# Altium PCB NodeController.PcbDoc
Units mm, origin at the board's own origin, x right, y up, seen from the top; angles counter-clockwise.
Board outline 76.2 x 50.8 mm, 4 copper layers (Top Layer, Power, Ground, Bottom Layer), stack 1.586 mm thick; 34 components, 28 nets, 142 pads, 41 vias.
Unrouted connection lines stored in the file: 42.
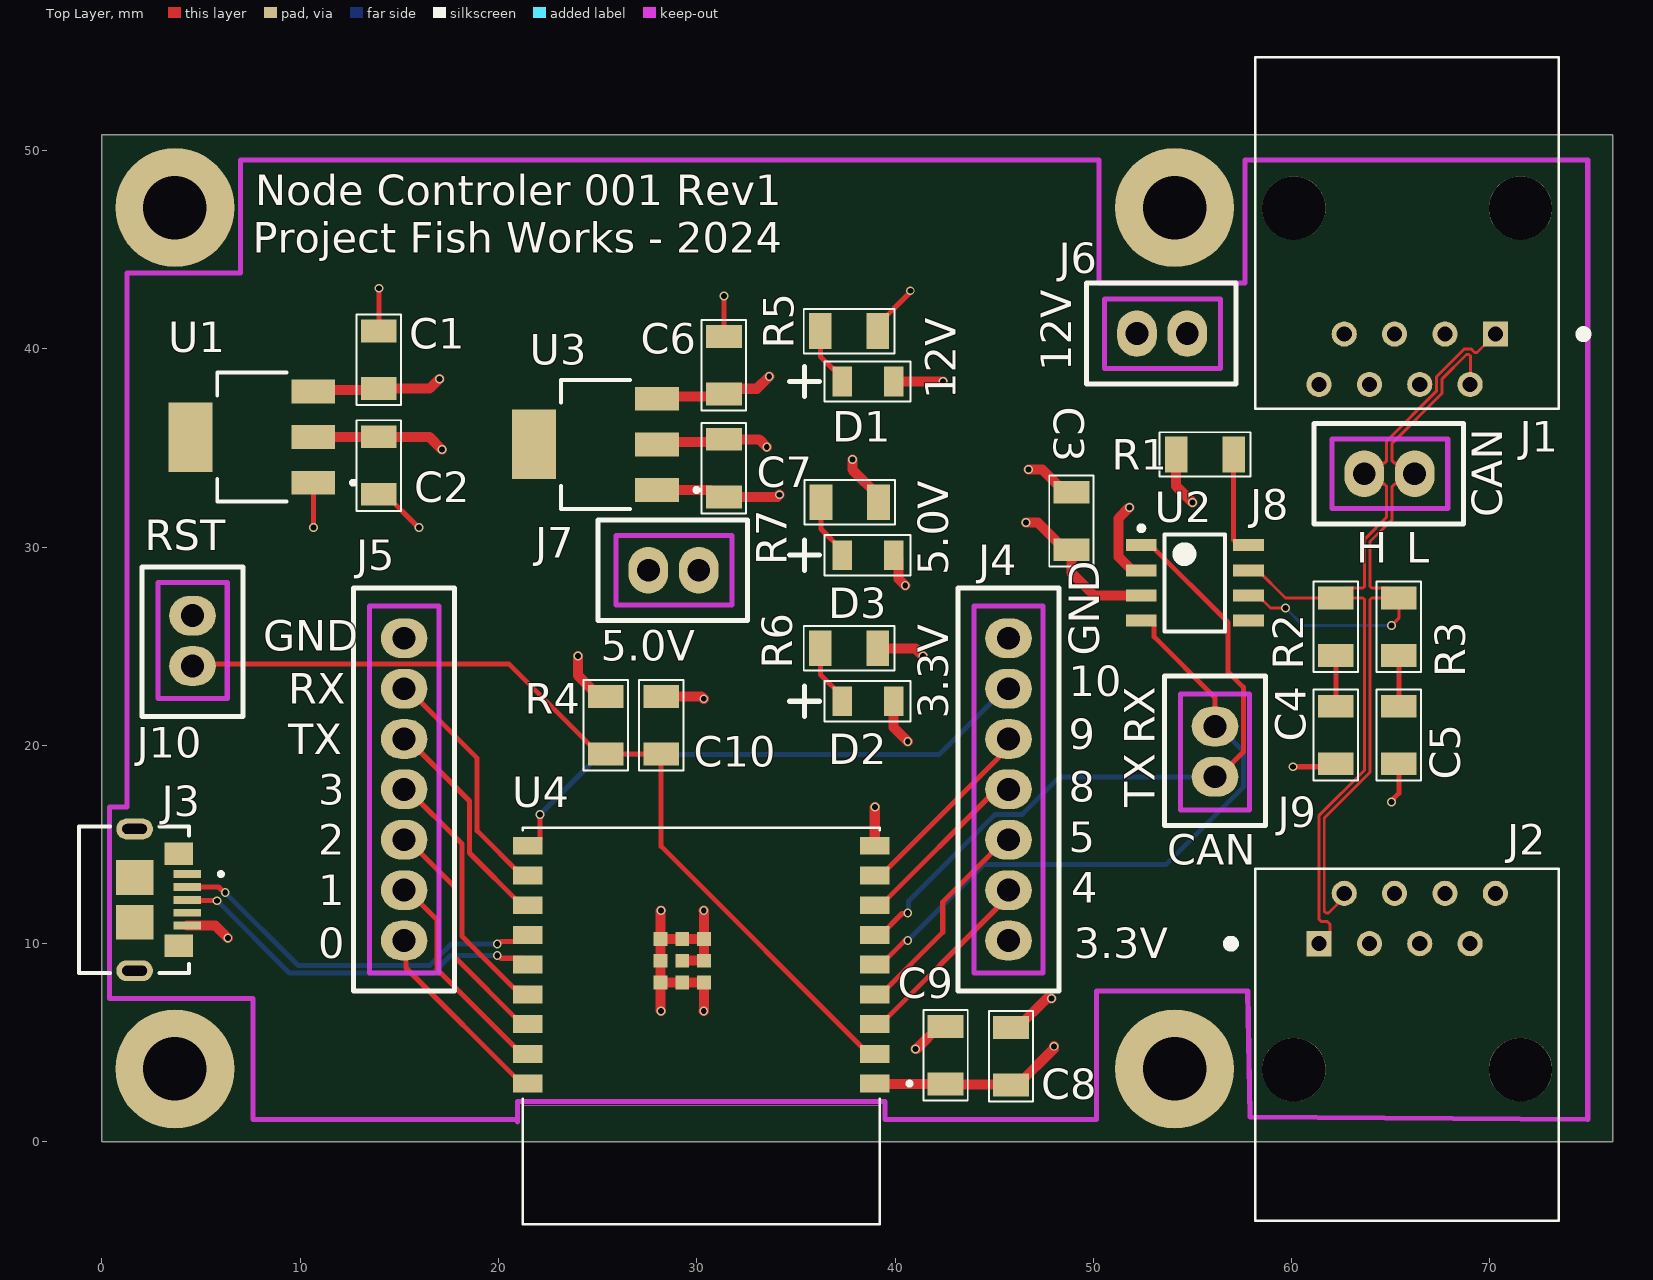
[diagram p0: Top Layer view]
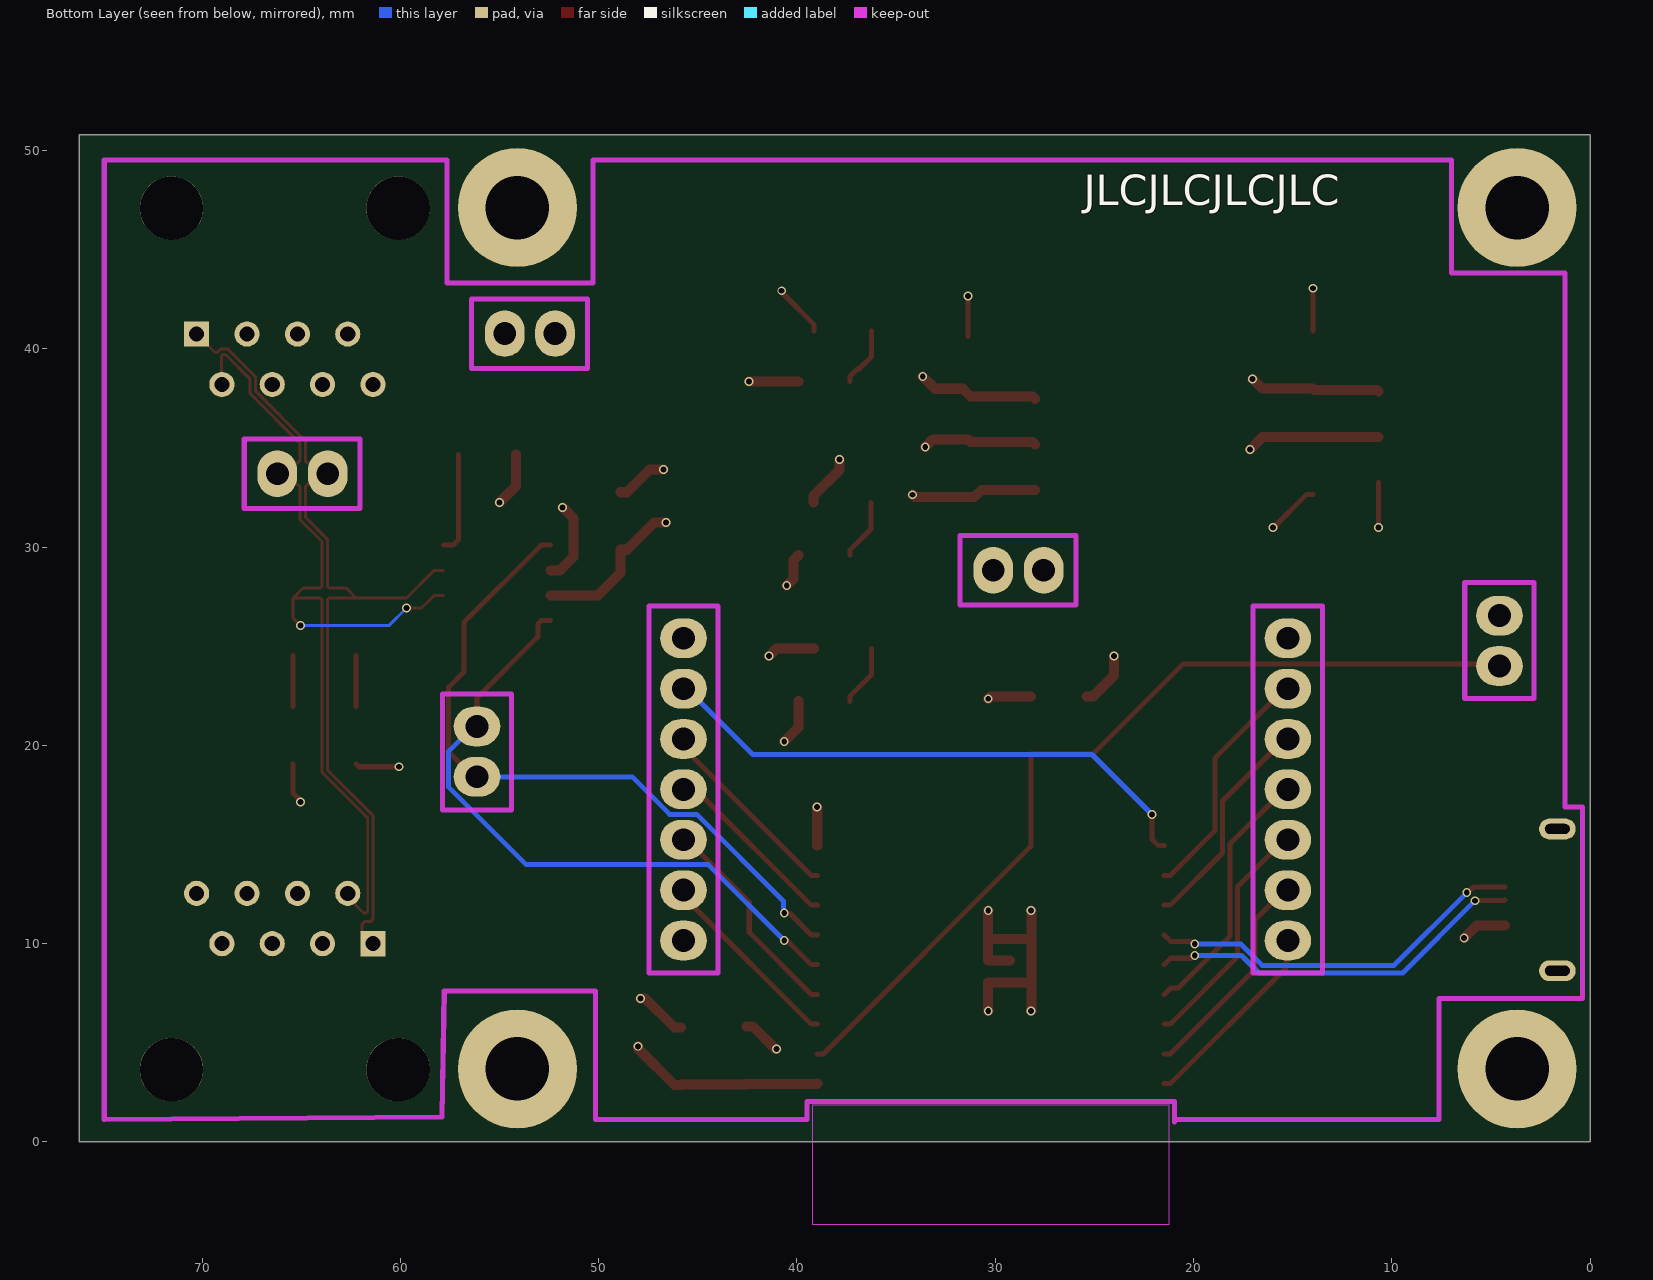
[diagram p1: Bottom Layer view, seen from below]
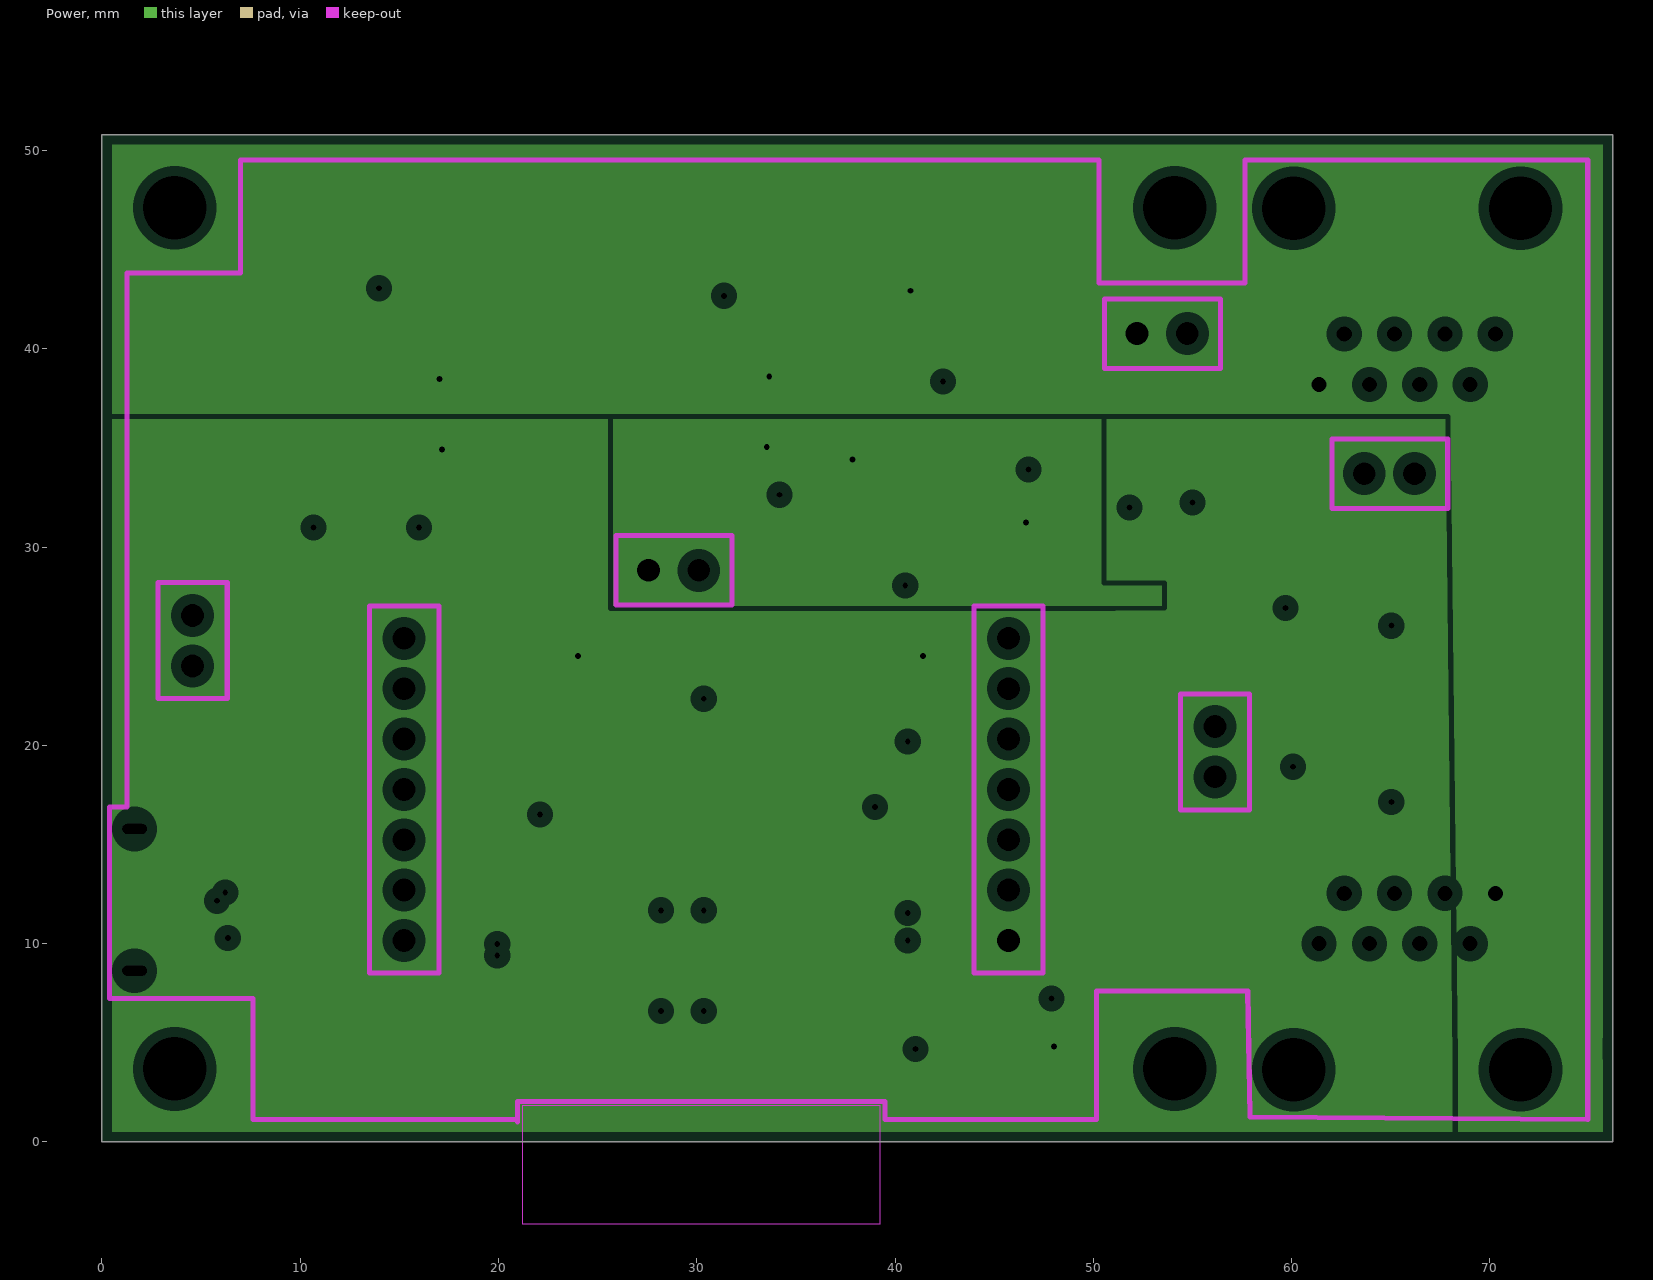
[diagram p2: Power, clearances drawn from the general rule]
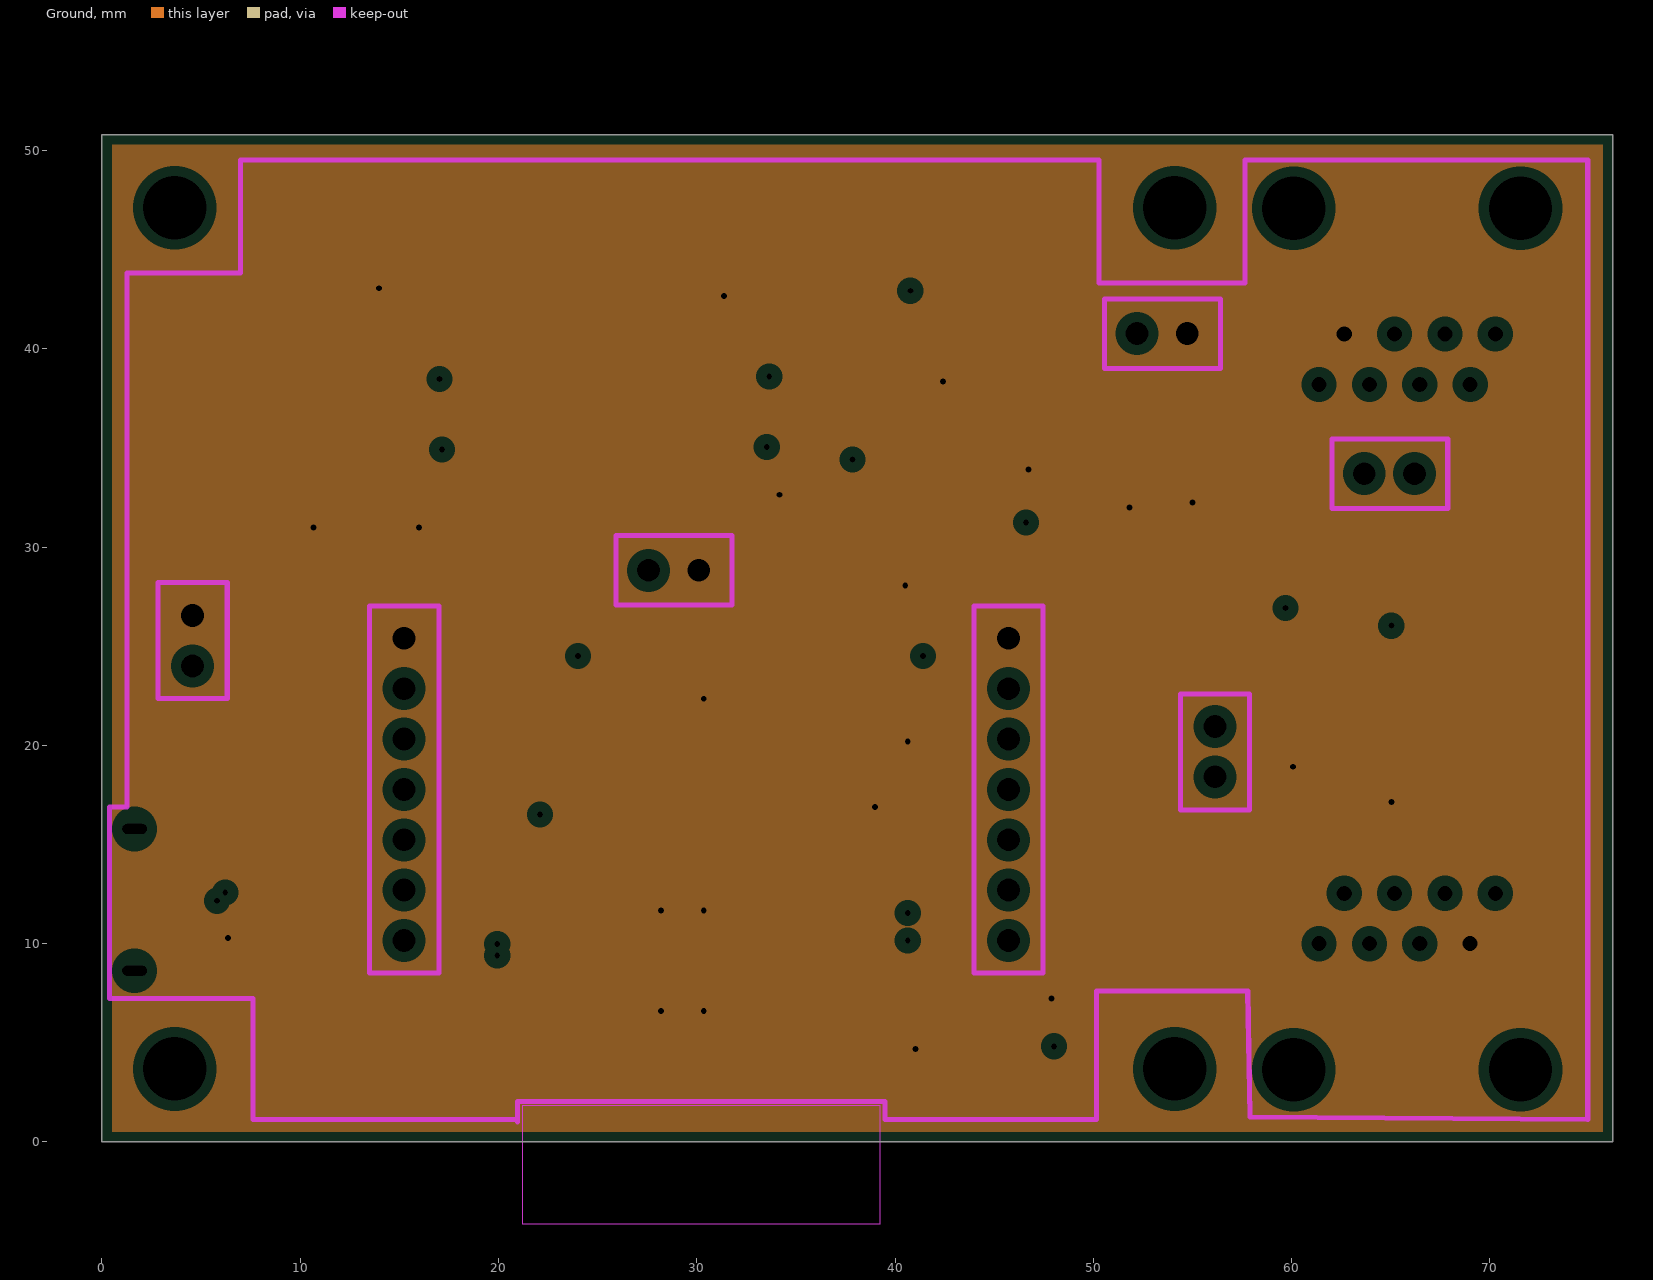
[diagram p3: Ground, clearances drawn from the general rule]

## Layer stack, top to bottom
Top Solder: solder mask 0.0102, Solder Resist, Dk 3.8
Top Layer: signal copper 0.035
Dielectric 2: prepreg 0.2104, PP-7628, Dk 4.4
Power: plane copper 0.0152, net (Multiple Nets)
Dielectric 1: core 1.065, FR-4, Dk 4.6
Ground: plane copper 0.0152, net GND
Dielectric 3: prepreg 0.2104, PP-7628, Dk 4.4
Bottom Layer: signal copper 0.035
Bottom Solder: solder mask 0.0102, Solder Resist, Dk 3.8

## Board outline
0,0 76.2,0 76.2,50.8 0,50.8

## Design rules (kind name [scope] priority, off if disabled: settings)
Clearance [All] p1: gap=0.127 ignorepadtopadclearanceinfootprint=TRUE
DiffPairsRouting DiffPairsRouting_1 [InDifferentialPairClass('USB')] p1: maxlimit=1 minlimit=0.09 mostfreqgap=0.127 toplayer_minwidth=0.09 toplayer_maxwidth=1 toplayer_prefwidth=0.148 bottomlayer_minwidth=0.09 bottomlayer_maxwidth=1 bottomlayer_prefwidth=0.148 impedanceprofiledriven=TRUE impedanceprofileid={B7D09003-3519-449B-9E33-71E7C88A8C5F} impedanceprofilevalue=100.000000 maxuncoupledlength=12.7
DiffPairsRouting [InDifferentialPairClass('CAN ')] p2: maxlimit=0.127 minlimit=0.127 mostfreqgap=0.127 toplayer_minwidth=0.148 toplayer_maxwidth=0.148 toplayer_prefwidth=0.148 bottomlayer_minwidth=0.148 bottomlayer_maxwidth=0.148 bottomlayer_prefwidth=0.148 impedanceprofiledriven=TRUE impedanceprofileid={B7D09003-3519-449B-9E33-71E7C88A8C5F} impedanceprofilevalue=100.000000 maxuncoupledlength=12.7
HoleSize [All] p1: absolutevalues=TRUE maxlimit=6.3 minlimit=0.025 maxpercent=80.000 minpercent=20.000
MinimumSolderMaskSliver [All] p1: minsoldermaskwidth=0.08
PlaneClearance [All] p1: clearance=0.508
PlaneConnect [All] p1: planeconnectstyle=Relief reliefexpansion=0.508 reliefentries=4 reliefconductorwidth=0.254 reliefairgap=0.254
PolygonConnect [All] p1: connectstyle=Relief reliefconductorwidth=0.254 reliefentries=4 polygonreliefangle="90 Angle" airgapwidth=0.254
RoutingVias [All] p1: holewidth=0.3 width=0.45 viastyle="Through Hole" minholewidth=0.3 minwidth=0.25 maxholewidth=6.3 maxwidth=10
SilkToSilkClearance [All] p1: silktosilkclearance=0.15
SilkToSolderMaskClearance [IsPad] p1: minsilkscreentomaskgap=0.15 clearancetoexposedcopper=TRUE
SolderMaskExpansion [All] p1: expansion=0.102 istentingtop=FALSE
Width Width_POWER [InNetClass('Power')] p1: maxlimit=0.508 minlimit=0.254 preferedwidth=0.508 minimp=50.000000 maximp=50.000000 favimp=50.000000
Width [InNetClass('All Nets')] p2: maxlimit=0.508 minlimit=0.254 preferedwidth=0.254 minimp=50.000000 maximp=50.000000 favimp=50.000000
23 further rules are at their usual default settings.

## Classes and differential pairs
differential pair CAN: +CAN_P -CAN_N
differential pair "USB D": +"USB D_P" -"USB D_N"

## Components (designator, comment, footprint, x,y, rotation, side; value= is the part's Value field where it differs from the comment)
C1 "10uF" Resistor/Cap-1206 13.97,39.444 r270 top value=100pF
C2 "22uF" Resistor/Cap-1206 13.97,34.11 r90 top value=100pF
C3 "0.1uF" Resistor/Cap-1206 48.895,31.316 r270 top value=100pF
C4 "560pF" Resistor/Cap-1206 62.23,20.521 r270 top value=100pF
C5 "560pF" Resistor/Cap-1206 65.405,20.521 r270 top value=100pF
C6 "10uF" Resistor/Cap-1206 31.369,39.169 r270 top value=100pF
C7 "22uF" Resistor/Cap-1206 31.369,33.983 r90 top value=100pF
C8 "10uF" Resistor/Cap-1206 45.847,4.318 r90 top value=100pF
C9 "0.1uF" Resistor/Cap-1206 42.545,4.371 r90 top value=100pF
C10 "10uF" Resistor/Cap-1206 28.204,21.008 r90 top value=100pF
D1 "LED" LED-1206 40.005,38.354 r180 top
D2 "LED" LED-1206 40.005,22.225 r180 top
D3 "LED" LED-1206 40.005,29.591 r180 top
J1 "54602-908LF" AMPHENOL_54602-908LF 65.825,47.09 r180 top
J2 "54602-908LF" AMPHENOL_54602-908LF 65.825,3.65 r0 top
J3 "USB3076-XX-X_REVC5" GCT_USB3076-XX-X_REVC5 1.651,12.211 r270 top
J4 "CON7X1" CON7X1 45.72,10.16 r90 top
J5 "CON7X1" CON7X1 15.24,10.16 r90 top
J6 "CON2X1" CON2X1 52.197,40.767 r0 top
J7 "CON2X1" CON2X1 27.559,28.829 r0 top
J8 "CON2X1" CON2X1 63.66,33.7 r0 top
J9 "CON2X1" CON2X1 56.134,20.955 r270 top
J10 "CON2X1" CON2X1 4.572,24.003 r90 top
R1 "4.7K" Resistor/Cap-1206 55.626,34.671 r0 top
R2 "100" Resistor/Cap-1206 62.23,25.982 r270 top
R3 "100" Resistor/Cap-1206 65.405,25.982 r270 top
R4 "10K" Resistor/Cap-1206 25.404,21.008 r270 top
R5 "1k" Resistor/Cap-1206 37.681,40.894 r180 top
R6 "1k" Resistor/Cap-1206 37.681,24.892 r180 top
R7 "1k" Resistor/Cap-1206 37.719,32.258 r180 top
U1 "AZ1117IH-3.3TRG1" SOT230P700X185-4N 7.568,35.546 r180 top
U2 "MCP2551-I/SN" MCP2551 55.118,28.194 r0 top
U3 "AZ1117IH-5TRG1" SOT230P700X185-4N 24.892,35.179 r180 top
U4 "ESP32-C3-WROOM-02" MODULE_ESP32-C3-WROOM-02-H4 30.226,5.842 r180 top

## Footprints (in the part's own frame and the unit in brackets; to place one, negate y for a bottom-side part, rotate by r counter-clockwise, add the part's x,y. Pads: shape width x height; smd on the part's side, far side on the other; paste and mask are expansions set on the pad)
AMPHENOL_54602-908LF [mm]
  rect 1.268x1.268 / inner round 1.268 / far side rect 1.268x1.268 hole 0.76: 1(-4.445,6.35)
  round 1.268 hole 0.76: 2(-3.175,8.89) 3(-1.905,6.35) 4(-0.635,8.89) 5(0.635,6.35) 6(1.905,8.89) 7(3.175,6.35) 8(4.445,8.89)
  round 3.2 hole 3.2 unplated: ""(-5.715,0) ""(5.715,0)
  silkscreen extent -9.09,-7.62 7.65,10.12, body extent -7.65,-7.62 7.65,10.12, height 12.7
CON2X1 [mm] "2.54mm based header"
  oval 2x2.35 hole 1.15: 0(0,0) 1(2.54,0)
  Keep-Out Layer lines w0.254: -1.63,-1.75 4.21,-1.75 4.21,1.75 -1.63,1.75 -1.63,-1.75
  silkscreen extent -2.54,-2.54 5,2.54
CON7X1 [mm] "2.54mm based header"
  oval 2x2.35 hole 1.15: 0(0,0) 1(2.54,0) 2(5.08,0) 3(7.62,0) 4(10.16,0) 5(12.7,0) 6(15.24,0)
  Keep-Out Layer lines w0.254: -1.63,1.75 -1.63,-1.75 16.87,-1.75 16.87,1.75 -1.63,1.75
  silkscreen extent -2.54,-2.54 17.78,2.54
GCT_USB3076-XX-X_REVC5 [mm]
  rect 0.4x1.4 smd mask+0.05: 1(-1.3,2.65) 2(-0.65,2.65) 3(0,2.65) 4(0.65,2.65) 5(1.3,2.65)
  oval 1.05x1.85 hole 0.5 slot 1.252 at 90 deg: 6(-3.575,0) 7(3.575,0)
  rect 1.15x1.45 smd mask+0.05: 8(-2.32,2.23) 9(2.32,2.23)
  rect 1.75x1.9 smd: 10(-1.125,0) 11(1.125,0)
  silkscreen extent -3.7,-2.8 3.7,4.45, body extent -3.7,-2.78 3.7,2.78, height 2.66
LED-1206 [mm]
  rect 1x1.5 smd: A(2.67,0) K(0.074,0)
  silkscreen extent -0.76,-1.02 5.33,1.02
MCP2551 [mm] "SOIC, 8-Leads, Body 4.9x3.9mm, Pitch 1.27mm"
  rect 1.55x0.6 smd: 1(-2.7,1.905) 2(-2.7,0.635) 3(-2.7,-0.635) 4(-2.7,-1.905) 5(2.7,-1.905) 6(2.7,-0.635) 7(2.7,0.635) 8(2.7,1.905)
  silkscreen extent -2.82,-2.45 1.53,2.88, body extent -3,-2.45 3,2.45, height 1.75
MODULE_ESP32-C3-WROOM-02-H4 [mm]
  rect 0.7x0.7 smd: 0(-0.14,-2.2) 0(-0.14,-3.3) 0(-0.14,-4.4) 0(0.96,-2.2) 0(0.96,-3.3) 0(0.96,-4.4) 0(2.06,-4.4) 0(2.06,-3.3) 0(2.06,-2.2)
  rect 1.5x0.9 smd: 1(-8.75,2.9) 2(-8.75,1.4) 3(-8.75,-0.1) 4(-8.75,-1.6) 5(-8.75,-3.1) 6(-8.75,-4.6) 7(-8.75,-6.1) 8(-8.75,-7.6) 9(-8.75,-9.1) 10(8.75,-9.1) 11(8.75,-7.6) 12(8.75,-6.1) 13(8.75,-4.6) 14(8.75,-3.1) 15(8.75,-1.6) 16(8.75,-0.1) 17(8.75,1.4) 18(8.75,2.9)
  Keep-Out Layer region: 9,4 -9,4 -9,10 9,10
  Keep-Out Layer region: 9,4 -9,4 -9,10 9,10
  silkscreen extent -10.6,-10 9,10, body extent -9,-10 9,10, height 3.35
Resistor/Cap-1206 [mm]
  rect 1.15x1.8 smd: 1(-1.45,0) 2(1.45,0)
  silkscreen extent -2.29,-1.12 2.29,1.12
SOT230P700X185-4N [mm]
  rect 2.2x1.2 smd: 1(-3.1,2.3) 2(-3.1,0) 3(-3.1,-2.3)
  rect 2.2x3.5 smd: 4(3.1,0)
  silkscreen extent -5.2,-3.25 1.75,3.25, body extent -3.5,-3.25 3.5,3.25, height 1.65

## Part data
C1 C2 C3 C4 C5 C6 C7 C8 C9 C10: library part Cap, "Capacitor", LatestRevisionDate=17-Jul-2002, LatestRevisionNote="Re-released for DXP Platform.", PackageDescription="Radial Cap, Thru-Hole; 2 Leads; 0.3 in Pin Spacing", PackageReference=RAD-0.3, Published=8-Jun-2000, Publisher="Altium Limited"
D1 D2 D3: "Light Emitting Diode LED"
J1 J2: "No Description Available", Mfr_Name="Amphenol ICC", Copyright="Copyright (C) 2024 Ultra Librarian. All rights reserved.", Manufacturer_Part_Number=54602-908LF, RefDes=RefDes, Type=DEV
J3: library part 10118193-0001LF, "Micro USB 2.0, Input Output Connectors, B TYPE RECEPTACLE", Package=None, Availability="In Stock", Check_prices=https://www.snapeda.com/parts/10118193-0001LF/Amphenol+FCI/view-part/?ref=eda, MF="Amphenol ICC", MP=10118193-0001LF, Price=None, Purchase-URL=https://pricing.snapeda.com/search/part/10118193-0001LF/?ref=eda, SnapEDA_Link=https://www.snapeda.com/parts/10118193-0001LF/Amphenol+FCI/view-part/?ref=snap
R1 R2 R3 R4 R5 R6 R7: library part RES1, "Resistor"
U1: library part AZ1117IH-3.3TRG1_1, "No Description Available", Mfr_Name="Diodes Inc", RefDes=RefDes, Type=Type
U2: "High-Speed CAN Transceiver, /  1 Mb/s, 4.5 to 5.5 V, 8-Pin SOIC (SN), Industrial Temperature, RoHS, Tube", Manufacturer=Microchip, ComponentLink1Description="Manufacturer URL", ComponentLink1URL=http://www.microchip.com/, ComponentLink2Description=Datasheet, ComponentLink2URL=http://ww1.microchip.com/downloads/en/DeviceDoc/21667f.pdf, ComponentLink3Description="Package Specification", ComponentLink3URL=http://www.microchip.com/stellent/groups/techpub_sg/documents/packagingspec/en012702.pdf, DatasheetVersion="Rev. F, 07/2010", Mounting Technology="Surface Mount", PackageDescription="8-Pin Small Outline Integrated Circuit, Body 4.9 x 3.9 mm, Pitch 1.27 mm", PackageReference=SN8, RoHSCompliant=true
U3: library part AZ1117IH-5TRG1_1_1, "No Description Available", Mfr_Name="Diodes Inc", RefDes=RefDes, Type=Type
U4: Datasheet=https://www.espressif.com/sites/default/files/documentation/esp32-c3-wroom-02_datasheet_en.pdf, ki_description="ESP32-C3-WROOM-02 is a general-purpose Wi-Fi and Bluetooth LE module. This module features a rich set of peripherals and high performance, which makes it an ideal choice for smart home, industrial automation, health care, consumer electronics, etc.", ki_keywords="esp32-c3 module", Reference=U

## Free pads (board coordinates)
  round 6 hole 3.2: 3(3.683,3.683) 3(3.683,47.117) 3(54.102,3.683) 3(54.102,47.117)

## Via types
v1: diameter 0.45, hole 0.3, Top Layer to Bottom Layer, 41 vias

## Nets (pads, with @x,y where several pads share a name; then routed paths per layer and width w, separated by ;. In a path a pad name is that pad's centre, name@x,y a point inside that pad or via, vN(x,y) a via of type N, cw(c..) or ccw(c..) an arc to the next point about the centre after c; other vN are vias at no path point)
+3.3: C2.2 C8.1 C9.1 J4.0 R4.1 R6.1 U1.2 U4.1 | length 21.9
  Top Layer w0.508: U1.2 10.675,35.553 13.963,35.553 C2.2 16.51,35.56 v1(17.145,34.925) ; v1(24.003,24.511) 24.003,23.534 25.079,22.458 R4.1 ; U4.1 38.987,2.931 42.535,2.931 C9.1 42.571,2.895 45.821,2.895 C8.1 46.172,2.868 48.006,4.702 v1(48.006,4.826) ; R6.1 41.021,24.892 v1(41.402,24.511)
+5: C3.2 C7.2 J7.0 R7.1 U2.3 U3.2 | length 16.5
  Top Layer w0.508: U3.2 28.119,35.306 31.242,35.306 C7.2 33.147,35.433 v1(33.528,35.052) ; v1(37.846,34.417) 37.846,33.906 39.169,32.583 R7.1 ; v1(46.609,31.242) 47.194,31.242 48.57,29.866 C3.2 48.895,28.702 50.038,27.559 U2.3
+12: C1.2 C6.2 J1.8 J2.8 J6.0 R5.1 U1.3 U3.3 | length 15.5
  Top Layer w0.254: R5.1 39.131,41.219 40.729,42.818 40.729,42.888 v1(40.767,42.926)
  Top Layer w0.508: U1.3 10.742,37.92 13.896,37.92 C1.2 16.531,37.994 v1(17.018,38.481) ; U3.3 28.112,37.599 31.249,37.599 C6.2 31.634,37.984 33.031,37.984 v1(33.655,38.608)
CAN_N: J1.2 J2.2 J8.1 R3.1 U2.6 | length 47.7
  Top Layer w0.148: U2.6 58.293,27.559 58.928,26.924 v1(59.69,26.924) ; J2.2 62.65,12.34 61.853,11.543 61.73,11.543 61.644,11.63 61.644,16.336 63.955,18.648 63.955,27.345 64.042,27.432 R3.1 ; v1(65.024,26.035) 65.405,26.416 R3.1 ; J1.2 69.027,38.227 69.027,39.62 68.941,39.707 68.818,39.707 67.57,38.459 67.57,37.74 65.068,35.237 65.068,34.348 65.187,34.229 65.671,34.229 J8.1 65.671,33.171 65.187,33.171 65.068,33.052 65.068,31.396 63.955,30.284 63.955,28.02 64.042,27.933 64.904,27.933 R3.1
  Bottom Layer w0.148: v1(59.69,26.924) 60.579,26.035 v1(65.024,26.035)
CAN_P: J1.1 J2.1 J8.0 R2.1 U2.7 | length 44.7
  Top Layer w0.148: U2.7 58.293,28.829 59.69,27.432 R2.1 ; J2.1 61.94,10.56 61.94,10.972 61.803,11.109 61.505,11.109 61.368,11.246 61.368,16.45 63.68,18.762 63.68,27.345 63.593,27.432 R2.1 ; J1.1 69.345,39.815 69.222,39.815 69.055,39.982 68.704,39.982 67.295,38.573 67.295,37.854 64.792,35.351 64.792,34.348 64.673,34.229 64.189,34.229 J8.0 64.189,33.171 64.673,33.171 64.792,33.052 64.792,31.51 63.68,30.398 63.68,28.02 63.593,27.933 62.731,27.933 R2.1
CAN_RX: J9.0 U2.4 U4.5 | length 33.2
  Top Layer w0.254: U4.5 39.276,8.942 40.457,10.122 40.602,10.122 v1(40.64,10.16) ; U2.4 52.893,26.289 53.066,26.116 53.066,25.473 56.134,22.405 J9.0
  Bottom Layer w0.254: v1(40.64,10.16) 44.466,13.986 53.653,13.986 57.563,17.896 57.563,19.701 56.309,20.955 J9.0
CAN_TX: J9.1 U2.1 U4.6 | length 35.6
  Top Layer w0.254: U4.6 39.276,10.442 40.354,11.519 40.602,11.519 v1(40.64,11.557) ; U2.1 52.893,30.099 56.789,26.203 56.789,23.706 57.563,22.932 57.563,19.669 56.309,18.415 J9.1
  Bottom Layer w0.254: v1(40.64,11.557) 40.678,11.595 40.678,12.146 45.058,16.526 46.414,16.526 48.303,18.415 J9.1
GND: C1.1 C2.1 C3.1 C4.2 C5.2 C6.1 C7.1 C8.2 C9.2 C10.2 D1.K D2.K D3.K J1.7 J2.7 J3.5 J4.6 J5.6 J6.1 J7.1 J10.1 R1.1 U1.1 U2.2 U3.1 U4.0 U4.9 | length 61.7
  Top Layer w0.254: v1(10.668,30.988) U1.1 ; C2.1 14.295,32.66 15.967,30.988 v1(16.002,30.988) ; C1.1 v1(13.97,43.053) ; C6.1 v1(31.369,42.672) ; v1(60.071,18.923) 62.082,18.923 C4.2 ; v1(65.024,17.145) 65.024,17.198 65.405,17.579 C5.2
  Top Layer w0.508: J3.5 5.726,10.911 v1(6.35,10.287) ; U3.1 30.698,32.879 31.044,32.533 C7.1 34.057,32.533 v1(34.163,32.639) ; v1(28.194,6.604) 28.166,6.632 U4.0@28.166,8.042 ; v1(28.194,11.684) 28.166,11.656 U4.0@28.166,10.242 ; C10.2 30.247,22.458 v1(30.353,22.352) ; U4.0@29.266,9.142 30.366,9.142 U4.0@30.366,10.242 ; v1(30.353,6.604) 30.366,6.617 30.366,8.042 29.266,8.042 U4.0@28.166,8.042 ; v1(30.353,11.684) 30.366,11.671 U4.0@30.366,10.242 ; U4.9 38.976,16.878 v1(38.989,16.891) ; D2.K 39.931,20.902 v1(40.64,20.193) ; D3.K 40.177,29.345 40.177,28.403 v1(40.513,28.067) ; D1.K v1(42.418,38.354) ; v1(41.021,4.699) 41.098,4.699 42.22,5.821 C9.2 ; C8.2 46.172,5.768 47.643,7.239 v1(47.879,7.239) ; v1(46.736,33.909) 47.427,33.909 48.57,32.766 C3.1 ; v1(51.816,32.004) 51.262,31.45 51.262,29.51 51.943,28.829 U2.2 ; R1.1 54.176,33.073 v1(54.991,32.258) ; U4.0@28.166,8.042 28.166,9.142 U4.0@28.166,10.242 ; U4.0@28.166,10.242 29.266,10.242 U4.0@30.366,10.242
GPIO0: J5.0 U4.18 | length 10
  Top Layer w0.254: J5.0 15.339,10.061 15.339,8.779 21.176,2.942 U4.18
GPIO1: J5.1 U4.17 | length 11.1
  Top Layer w0.254: J5.1 15.415,12.7 16.891,11.224 16.891,8.727 21.176,4.442 U4.17
GPIO2: J5.2 U4.16 | length 12.2
  Top Layer w0.254: J5.2 15.415,15.24 17.78,12.875 17.78,9.338 21.176,5.942 U4.16
GPIO3: J5.3 U4.15 | length 13.2
  Top Layer w0.254: J5.3 15.415,17.78 18.161,15.034 18.161,10.377 20.773,7.765 21.153,7.765 U4.15
GPIO4: J4.1 U4.3 | length 9.7
  Top Layer w0.254: U4.3 39.276,5.942 45.211,11.877 45.211,12.191 J4.1
GPIO5: J4.2 U4.4 | length 10.9
  Top Layer w0.254: U4.4 39.276,7.442 42.405,10.571 42.405,12.1 45.545,15.24 J4.2
GPIO8: J4.3 U4.7 | length 9.2
  Top Layer w0.254: U4.7 39.276,11.942 45.114,17.78 J4.3
GPIO9: J4.4 U4.8 | length 9.8
  Top Layer w0.254: U4.8 39.276,13.442 45.211,19.377 45.211,19.811 J4.4
GPIO10: J4.5 U4.10 | length 28.3
  Top Layer w0.254: U4.10 21.775,14.942 22.098,15.265 v1(22.098,16.51)
  Bottom Layer w0.254: v1(22.098,16.51) 25.125,19.537 42.222,19.537 45.545,22.86 J4.5
NetC4_1: C4.1 R2.2 | length 2.6
  Top Layer w0.254: C4.1 R2.2
NetC5_1: C5.1 R3.2 | length 2.6
  Top Layer w0.254: C5.1 R3.2
NetC10_1: C10.1 J10.0 R4.2 U4.2 | length 45.3
  Top Layer w0.254: J10.0 4.683,24.114 20.523,24.114 25.079,19.558 R4.2 C10.1 28.204,14.914 38.676,4.442 U4.2
NetD1_A: D1.A R5.2 | length 3.1
  Top Layer w0.254: R5.2 36.231,39.613 36.867,38.977 36.962,38.977 37.335,38.604 D1.A
NetD2_A: D2.A R6.2 | length 3.1
  Top Layer w0.254: R6.2 36.231,23.579 37.335,22.475 D2.A
NetD3_A: D3.A R7.2 | length 3.1
  Top Layer w0.254: R7.2 36.269,30.907 37.335,29.841 D3.A
NetR1_2: R1.2 U2.8 | length 5.2
  Top Layer w0.254: R1.2 57.076,30.366 57.343,30.099 U2.8
RXD: J5.5 U4.11 | length 12.3
  Top Layer w0.254: J5.5 15.415,22.86 18.923,19.352 18.923,15.695 21.176,13.442 U4.11
TXD: J5.4 U4.12 | length 11.2
  Top Layer w0.254: J5.4 15.415,20.32 18.542,17.193 18.542,14.576 21.176,11.942 U4.12
"USB D_N": J3.2 U4.13 | length 19.4
  Top Layer w0.254: J3.2 5.882,12.861 6.17,12.573 v1(6.223,12.573) ; v1(19.939,9.98) 19.992,9.98 20.131,10.119 21.153,10.119 U4.13
  Bottom Layer w0.254: v1(6.223,12.573) 9.89,8.906 16.54,8.906 17.614,9.98 v1(19.939,9.98)
"USB D_P": J3.3 U4.14 | length 19.3
  Top Layer w0.254: J3.3 4.324,12.188 5.792,12.188 v1(5.815,12.165) ; v1(19.939,9.403) 19.992,9.403 20.131,9.265 21.153,9.265 U4.14
  Bottom Layer w0.254: v1(5.815,12.165) 9.455,8.525 16.698,8.525 17.576,9.403 v1(19.939,9.403)
pads on no net: J1. J1.3 J1.4 J1.5 J1.6 J2. J2.3 J2.4 J2.5 J2.6 J3.1 J3.4 J3.6 J3.7 J3.8 J3.9 J3.10 J3.11 U1.4 U2.5 U3.4

## Polygon pours and split planes (outlines as drawn)
+3.3 on Power (split plane): 68.119,4.141 68.119,0.51 0.51,0.51 0.51,36.447 25.525,36.447 25.525,26.9 25.534,26.85 25.562,26.808 25.604,26.78 25.654,26.771 51.054,26.771 51.055,26.771 53.595,26.795 53.619,26.8 53.644,26.804 53.644,26.805 53.645,26.805 53.665,26.819 53.686,26.832 53.686,26.833 53.7,26.854 53.714,26.874 53.714,26.875 53.714,26.876 53.719,26.9 53.723,26.924 53.723,28.194 53.714,28.244 53.686,28.286 53.644,28.314 53.594,28.323 50.675,28.323 50.675,36.447 67.752,36.447
+12 on Power (split plane): 75.69,5.263 75.68,5.25 75.671,5.2 75.671,4.2 75.68,4.15 75.69,4.137 75.69,0.51 68.378,0.51 68.378,4.142 68.378,4.143 68.01,36.577 68.005,36.601 68,36.626 67.999,36.626 67.999,36.627 67.985,36.647 67.972,36.668 67.971,36.668 67.971,36.669 67.95,36.682 67.93,36.696 67.929,36.696 67.928,36.696 67.904,36.701 67.88,36.705 0.51,36.705 0.51,50.29 75.69,50.29
+5 on Power (split plane): 50.417,28.194 50.426,28.144 50.454,28.102 50.496,28.074 50.546,28.065 53.465,28.065 53.465,27.052 51.053,27.03 25.783,27.03 25.783,36.447 50.417,36.447
GND on Ground (split plane): 75.69,0.51 0.51,0.51 0.51,50.29 75.69,50.29

## Keep-outs
Keep-Out Layer:
  lines w0.254: 20.828,1.143 7.62,1.143 7.62,7.239 1.27,7.239 0.381,7.239 0.381,16.891 1.27,16.891 1.27,43.815 6.985,43.815 6.985,49.53 50.292,49.53 50.292,43.307 57.658,43.307 57.658,49.53 74.93,49.53 74.93,1.143 57.891,1.27 57.785,7.62 50.165,7.62 50.165,1.143 39.497,1.143 39.497,2.032 20.955,2.032 20.955,1.016

## Other copper
Power (plane layer: these items are gaps in the copper):
  lines w0.254: 25.654,36.576 25.654,26.9 51.054,26.9 53.594,26.924 53.594,28.194 50.546,28.194 50.546,36.576 ; 67.691,0 76.2,0 76.2,36.576 ; 68.249,-0.065 68.249,4.142 67.88,36.576 50.546,36.576 ; 75.8,4.2 75.8,5.2 ; 76.2,41.91 76.2,50.8 0,50.8 0,36.576 50.546,36.576

## Silkscreen, mask and mechanical layers (free items; w line width, h text height)
Top Overlay:
  text "Node Controler 001 Rev1" at 7.747,47.244 h1.52
  text "Project Fish Works - 2024" at 7.62,44.831 h1.52
  text "12V" at 48.895,38.862 h1.52 r90
  text "12V" at 43.053,37.465 h1.52 r90
  text "CAN" at 70.612,31.496 h1.52 r90
  text "RST" at 2.159,29.845 h1.52
  text "H" at 63.246,29.21 h1.52
  text "L" at 65.786,29.21 h1.52
  text "5.0V" at 42.672,28.575 h1.52 r90
  text "GND" at 8.128,24.765 h1.52
  text "GND" at 50.292,24.511 h1.52 r90
  text "5.0V" at 25.146,24.257 h1.52
  text "10" at 48.768,22.479 h1.52
  text "RX" at 9.398,22.098 h1.52
  text "3.3V" at 42.672,21.336 h1.52 r90
  text "RX" at 53.086,20.066 h1.52 r90
  text "9" at 48.768,19.812 h1.52
  text "TX" at 9.398,19.558 h1.52
  text "8" at 48.768,17.145 h1.52
  text "3" at 10.922,17.018 h1.52
  text "TX" at 53.086,16.891 h1.52 r90
  text "5" at 48.768,14.605 h1.52
  text "2" at 10.922,14.478 h1.52
  text "CAN" at 53.721,13.97 h1.52
  text "4" at 48.895,12.065 h1.52
  text "1" at 10.922,11.938 h1.52
  text "0" at 10.922,9.271 h1.52
  text "3.3V" at 49.022,9.271 h1.52
Bottom Overlay:
  text "JLCJLCJLCJLC" at 25.527,47.244 h1.52

## Dimensions
76.2,0 to 76.2,50.8 on Mechanical 1
0,0 to 76.2,0 on Mechanical 1
15.24,10.16 to 45.72,10.16 on Mechanical 1